# Altium PCB PCB2.PcbDoc
Units mm, origin at the board's own origin, x right, y up, seen from the top; angles counter-clockwise.
Board outline 51 x 64 mm, 2 copper layers (Top Layer, Bottom Layer); 5 components, 40 nets, 100 pads, 20 vias.
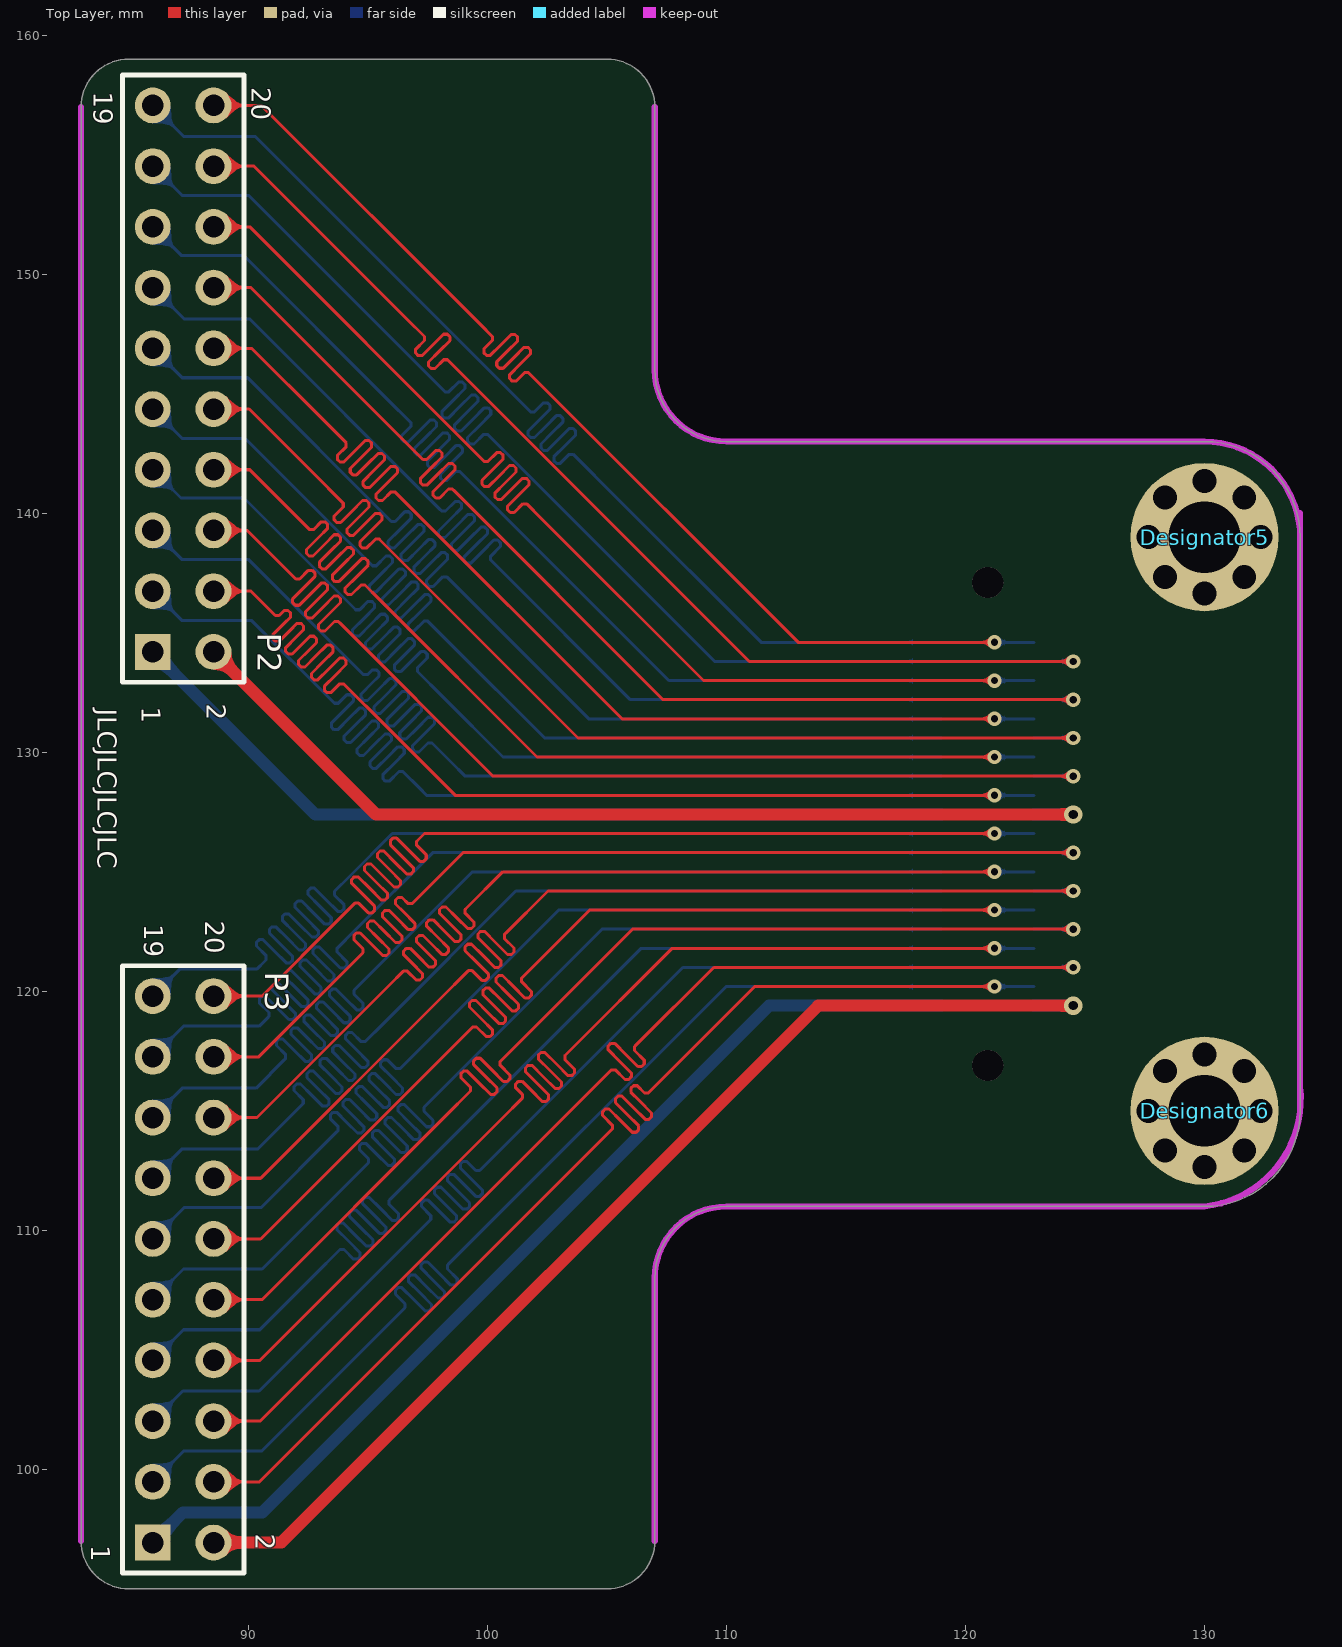
[diagram p0: Top Layer view]
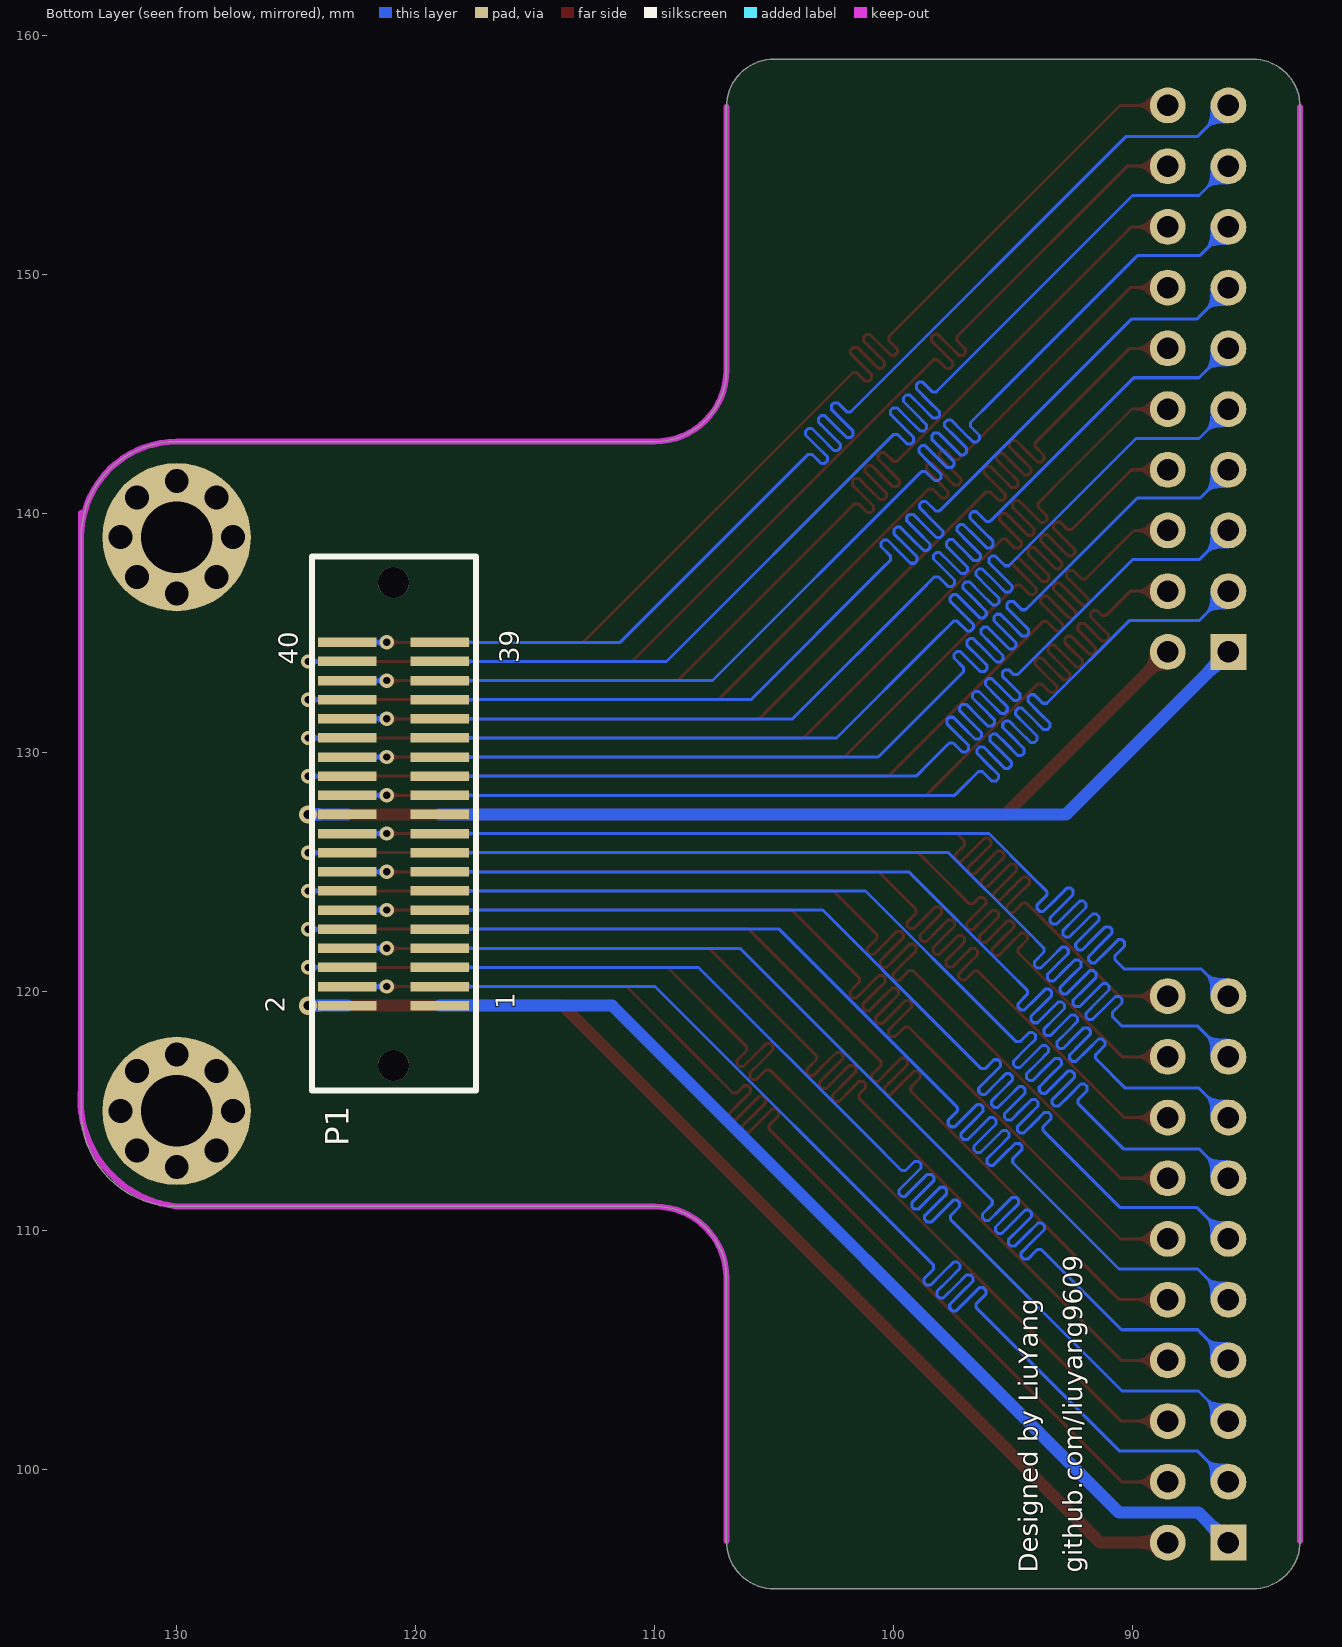
[diagram p1: Bottom Layer view, seen from below]

## Layer stack, top to bottom
Top Solder: solder mask 0.0102, Solder Resist, Dk 3.5
Top Layer: signal copper 0.0356
Dielectric 1: dielectric 0.32, FR-4, Dk 4.8
Bottom Layer: signal copper 0.0356
Bottom Solder: solder mask 0.0102, Solder Resist, Dk 3.5

## Board outline
85,95 105,95 ccw(c105,97) 107,97 107,108 cw(c110,108) 110,111 130,111 ccw(c130,115) 134,115 134,139 ccw(c130,139) 130,143 110,143 cw(c110,146) 107,146 107,157 ccw(c105,157) 105,159 85,159 ccw(c85,157) 83,157 83,97 ccw(c85,97)

## Design rules (kind name [scope] priority, off if disabled: settings)
Clearance [All] p1: gap=0.2
Length 2 [InNetClass('Right')] p1: maxlimit=51 minlimit=50
Length 1 [InNetClass('Left')] p2: maxlimit=51 minlimit=50
PolygonConnect [All] p1: connectstyle=Relief reliefconductorwidth=0.254 reliefentries=4 polygonreliefangle="90 Angle" airgapwidth=0.254
RoutingVias [All] p1: holewidth=0.3 width=0.6 viastyle="Through Hole" minholewidth=0.3 minwidth=0.6 maxholewidth=5 maxwidth=5
SolderMaskExpansion [All] p1: expansion=0.102
Width [All] p1: maxlimit=1.27 minlimit=0.127 preferedwidth=0.127
30 further rules are at their usual default settings.

## Classes and differential pairs
net class Right: RIGHT_P3 RIGHT_P4 RIGHT_P5 RIGHT_P6 RIGHT_P7 RIGHT_P8 RIGHT_P9 RIGHT_P10 RIGHT_P11 RIGHT_P12 RIGHT_P13 RIGHT_P14 RIGHT_P15 RIGHT_P16 RIGHT_P17 RIGHT_P18 RIGHT_P19 RIGHT_P20
net class Left: LEFT_P3 LEFT_P4 LEFT_P5 LEFT_P6 LEFT_P7 LEFT_P8 LEFT_P9 LEFT_P10 LEFT_P11 LEFT_P12 LEFT_P13 LEFT_P14 LEFT_P15 LEFT_P16 LEFT_P17 LEFT_P18 LEFT_P19 LEFT_P20
component class Sheet1: P2 P3

## Components (designator, comment, footprint, x,y, rotation, side; value= is the part's Value field where it differs from the comment)
Designator5 "Comment" 定位孔 130,139 r0 top
Designator6 "Comment" 定位孔 130,115 r0 top
P1 "Header 20X2" BTB0.8con40Pin 119,119.4 r0 bottom
P2 "Header 10X2" HDR2X10 86,134.2 r90 top
P3 "Header 10X2" HDR2X10 86,96.94 r90 top

## Footprints (in the part's own frame and the unit in brackets; to place one, negate y for a bottom-side part, rotate by r counter-clockwise, add the part's x,y. Pads: shape width x height; smd on the part's side, far side on the other; paste and mask are expansions set on the pad)
BTB0.8con40Pin [mm]
  rect 2.44x0.4 smd: 1(0,0) 2(3.86,0) 3(0,-0.8) 4(3.86,-0.8) 5(0,-1.6) 6(3.86,-1.6) 7(0,-2.4) 8(3.86,-2.4) 9(0,-3.2) 10(3.86,-3.2) 11(0,-4) 12(3.86,-4) 13(0,-4.8) 14(3.86,-4.8) 15(0,-5.6) 16(3.86,-5.6) 17(0,-6.4) 18(3.86,-6.4) 19(0,-7.2) 20(3.86,-7.2) 21(0,-8) 22(3.86,-8) 23(0,-8.8) 24(3.86,-8.8) 25(0,-9.6) 26(3.86,-9.6) 27(0,-10.4) 28(3.86,-10.4) 29(0,-11.2) 30(3.86,-11.2) 31(0,-12) 32(3.86,-12) 33(0,-12.8) 34(3.86,-12.8) 35(0,-13.6) 36(3.86,-13.6) 37(0,-14.4) 38(3.86,-14.4) 39(0,-15.2) 40(3.86,-15.2)
  round 1.3 hole 1.3: 41(1.93,-17.7) 42(1.93,2.5)
  silkscreen extent -1.52,-18.8 5.33,3.56
HDR2X10 [mm] "Connector; Header; 10x2 Position"
  rect 1.5x1.5 hole 0.9: 1(0,0)
  round 1.5 hole 0.9: 2(0,-2.54) 3(2.54,0) 4(2.54,-2.54) 5(5.08,0) 6(5.08,-2.54) 7(7.62,0) 8(7.62,-2.54) 9(10.16,0) 10(10.16,-2.54) 11(12.7,0) 12(12.7,-2.54) 13(15.24,0) 14(15.24,-2.54) 15(17.78,0) 16(17.78,-2.54) 17(20.32,0) 18(20.32,-2.54) 19(22.86,0) 20(22.86,-2.54)
  silkscreen extent -1.27,-3.81 24.13,1.27
定位孔 [mm]
  round 1 hole 1: 1(-2.35,0) 1(-1.662,-1.662) 1(-1.662,1.662) 1(0,-2.35) 1(0,2.35) 1(1.662,-1.662) 1(1.662,1.662) 1(2.35,0)
  round 6.2 hole 3: 1(0,0)

## Part data
P1: "Header, 20-Pin, Dual row"
P2 P3: "Header, 10-Pin, Dual row"

## Via types
v1: diameter 0.6, hole 0.3, Top Layer to Bottom Layer, 18 vias
v2: diameter 0.762, hole 0.381, Top Layer to Bottom Layer, 2 vias

## Nets (pads, with @x,y where several pads share a name; then routed paths per layer and width w, separated by ;. In a path a pad name is that pad's centre, name@x,y a point inside that pad or via, vN(x,y) a via of type N, cw(c..) or ccw(c..) an arc to the next point about the centre after c; other vN are vias at no path point)
LEFT_P1: P1.1 P3.1 | length 42.3
  Bottom Layer w0.508: P3.1 87.256,98.196 90.576,98.196 111.78,119.4 P1.1
LEFT_P2: P1.2 P3.2 | length 46.9
  Top Layer w0.508: P3.2 91.377,96.94 113.837,119.4 v2(124.507,119.4)
  Bottom Layer w0.508: P1.2 v2(124.507,119.4)
LEFT_P3: P1.3 P3.3 | length 50.2
  Bottom Layer w0.127: P3.3 87.282,100.762 90.551,100.762 95.529,105.74 96.555,106.766 96.555,106.927 96.151,107.331 96.151,107.493 96.259,107.601 96.42,107.601 96.905,107.116 97.39,106.631 97.552,106.631 97.659,106.739 97.659,106.901 97.175,107.385 96.69,107.87 96.69,108.032 96.797,108.14 96.959,108.14 97.444,107.655 97.929,107.17 98.09,107.17 98.198,107.278 98.198,107.439 97.713,107.924 97.229,108.409 97.229,108.571 97.336,108.678 97.498,108.678 97.983,108.194 98.468,107.709 98.629,107.709 98.737,107.816 98.737,107.978 98.333,108.382 98.333,108.544 98.387,108.598 109.989,120.2 P1.3
LEFT_P4: P1.4 P3.4 | length 49.8
  Top Layer w0.127: P3.4 90.463,99.48 105.169,114.186 105.223,114.24 105.223,114.401 104.819,114.805 104.819,114.967 104.926,115.075 105.088,115.075 105.573,114.59 106.058,114.105 106.219,114.105 106.327,114.213 106.327,114.374 105.842,114.859 105.357,115.344 105.357,115.506 105.465,115.613 105.627,115.613 106.112,115.129 106.596,114.644 106.758,114.644 106.866,114.752 106.866,114.913 106.381,115.398 105.999,115.78 105.999,115.942 106.106,116.05 106.268,116.05 106.57,115.748 106.731,115.748 108.077,117.094 111.183,120.2 v1(121.213,120.2)
  Bottom Layer w0.127: v1(121.213,120.2) P1.4
LEFT_P5: P1.5 P3.5 | length 50.5
  Bottom Layer w0.127: P3.5 87.256,103.276 90.449,103.276 97.574,110.401 97.628,110.455 97.628,110.617 97.249,110.996 97.249,111.158 97.356,111.265 97.518,111.265 97.978,110.805 98.438,110.345 98.6,110.345 98.708,110.453 98.708,110.615 98.248,111.075 97.788,111.535 97.788,111.696 97.895,111.804 98.057,111.804 98.517,111.344 98.977,110.884 99.139,110.884 99.247,110.992 99.247,111.153 98.786,111.613 98.326,112.074 98.326,112.235 98.434,112.343 98.596,112.343 99.056,111.883 99.516,111.423 99.678,111.423 99.785,111.531 99.785,111.692 99.325,112.152 98.865,112.612 98.865,112.774 98.973,112.882 99.135,112.882 99.514,112.502 99.675,112.502 101.054,113.881 108.173,121 P1.5
LEFT_P6: P1.6 P3.6 | length 49.7
  Top Layer w0.127: P3.6 90.488,102.02 103.378,114.91 105.186,116.718 105.348,116.718 105.752,116.314 105.914,116.314 106.021,116.422 106.021,116.583 105.537,117.068 105.052,117.553 105.052,117.715 105.159,117.822 105.321,117.822 105.806,117.338 106.291,116.853 106.452,116.853 106.56,116.96 106.56,117.122 106.156,117.526 106.156,117.688 106.21,117.742 109.468,121 v1(124.507,121)
  Bottom Layer w0.127: P1.6 v1(124.507,121)
LEFT_P7: P1.7 P3.7 | length 50.3
  Bottom Layer w0.127: P3.7 87.282,105.842 90.475,105.842 92.71,108.077 93.834,109.201 93.996,109.201 94.4,108.797 94.562,108.797 94.67,108.905 94.67,109.067 94.185,109.552 93.7,110.037 93.7,110.198 93.808,110.306 93.969,110.306 94.454,109.821 94.939,109.336 95.101,109.336 95.208,109.444 95.208,109.606 94.723,110.09 94.239,110.575 94.239,110.737 94.346,110.845 94.508,110.845 94.993,110.36 95.478,109.875 95.639,109.875 95.747,109.983 95.747,110.144 95.262,110.629 94.777,111.114 94.777,111.276 94.885,111.384 95.047,111.384 95.532,110.899 96.017,110.414 96.178,110.414 96.286,110.522 96.286,110.683 95.882,111.087 95.882,111.249 95.936,111.303 106.433,121.8 P1.7
LEFT_P8: P1.8 P3.8 | length 49.8
  Top Layer w0.127: P3.8 90.488,104.56 100.584,114.656 101.457,115.529 101.457,115.69 101.183,115.964 101.183,116.126 101.291,116.234 101.452,116.234 101.807,115.879 102.292,115.394 102.454,115.394 102.562,115.502 102.562,115.664 102.077,116.148 101.592,116.633 101.592,116.795 101.7,116.903 101.861,116.903 102.346,116.418 102.831,115.933 102.993,115.933 103.1,116.041 103.1,116.202 102.616,116.687 102.131,117.172 102.131,117.334 102.238,117.441 102.4,117.441 102.885,116.957 103.37,116.472 103.531,116.472 103.639,116.579 103.639,116.741 103.235,117.145 103.235,117.307 103.289,117.361 107.728,121.8 v1(121.213,121.8)
  Bottom Layer w0.127: v1(121.213,121.8) P1.8
LEFT_P9: P1.9 P3.9 | length 50.5
  Bottom Layer w0.127: P3.9 87.282,108.382 90.576,108.382 94.971,112.776 95.024,112.83 95.024,112.992 94.643,113.373 94.643,113.534 94.751,113.642 94.913,113.642 95.375,113.18 95.837,112.718 95.998,112.718 96.106,112.826 96.106,112.987 95.644,113.45 95.182,113.912 95.182,114.073 95.29,114.181 95.451,114.181 95.914,113.719 96.376,113.257 96.537,113.257 96.645,113.365 96.645,113.526 96.183,113.988 95.721,114.45 95.721,114.612 95.829,114.72 95.99,114.72 96.452,114.258 96.914,113.796 97.076,113.796 97.184,113.903 97.184,114.065 96.722,114.527 96.26,114.989 96.26,115.151 96.367,115.259 96.529,115.259 96.991,114.797 97.453,114.334 97.615,114.334 97.723,114.442 97.723,114.604 97.341,114.985 97.341,115.147 99.289,117.094 104.795,122.6 P1.9
LEFT_P10: P1.10 P3.10 | length 49.8
  Top Layer w0.127: P3.10 90.565,107.1 98.26,114.795 99.291,115.826 99.291,115.988 98.887,116.392 98.887,116.554 98.995,116.661 99.156,116.661 99.641,116.176 100.126,115.692 100.288,115.692 100.395,115.799 100.395,115.961 99.91,116.446 99.426,116.931 99.426,117.092 99.533,117.2 99.695,117.2 100.18,116.715 100.665,116.23 100.826,116.23 100.934,116.338 100.934,116.5 100.53,116.904 100.53,117.066 100.584,117.119 106.065,122.6 v1(124.507,122.6)
  Bottom Layer w0.127: P1.10 v1(124.507,122.6)
LEFT_P11: P1.11 P3.11 | length 50.5
  Bottom Layer w0.127: P3.11 87.307,110.947 90.526,110.947 93.701,114.122 93.754,114.176 93.754,114.338 93.425,114.667 93.425,114.828 93.533,114.936 93.695,114.936 94.105,114.526 94.56,114.071 94.722,114.071 94.83,114.178 94.83,114.34 94.374,114.796 93.964,115.206 93.964,115.367 94.072,115.475 94.234,115.475 94.644,115.065 95.099,114.609 95.261,114.609 95.369,114.717 95.369,114.879 94.913,115.335 94.503,115.744 94.503,115.906 94.611,116.014 94.773,116.014 95.182,115.604 95.638,115.148 95.8,115.148 95.908,115.256 95.908,115.418 95.452,115.873 95.042,116.283 95.042,116.445 95.15,116.553 95.311,116.553 95.721,116.143 96.177,115.687 96.339,115.687 96.446,115.795 96.446,115.956 95.991,116.412 95.535,116.868 95.535,117.03 95.643,117.137 95.804,117.137 96.179,116.762 96.341,116.762 97.955,118.377 102.978,123.4 P1.11
LEFT_P12: P1.12 P3.12 | length 50
  Top Layer w0.127: P3.12 90.514,109.64 98.412,117.538 99.384,118.511 99.546,118.511 99.95,118.106 100.112,118.106 100.219,118.214 100.219,118.376 99.735,118.861 99.25,119.346 99.25,119.507 99.357,119.615 99.519,119.615 100.004,119.13 100.489,118.645 100.65,118.645 100.758,118.753 100.758,118.915 100.273,119.4 99.808,119.865 99.808,120.027 99.916,120.134 100.077,120.134 100.543,119.669 101.028,119.184 101.189,119.184 101.297,119.292 101.297,119.454 100.812,119.938 100.361,120.39 100.361,120.551 100.469,120.659 100.63,120.659 101.082,120.208 101.566,119.723 101.728,119.723 101.836,119.831 101.836,119.992 101.432,120.396 101.432,120.558 101.486,120.612 104.274,123.4 v1(121.213,123.4)
  Bottom Layer w0.127: v1(121.213,123.4) P1.12
LEFT_P13: P1.13 P3.13 | length 50.5
  Bottom Layer w0.127: P3.13 87.231,113.411 90.399,113.411 92.24,115.252 92.294,115.306 92.294,115.468 91.911,115.851 91.911,116.013 92.019,116.12 92.181,116.12 92.644,115.657 93.108,115.193 93.27,115.193 93.377,115.301 93.377,115.462 92.914,115.926 92.45,116.39 92.45,116.551 92.558,116.659 92.719,116.659 93.183,116.195 93.647,115.732 93.808,115.732 93.916,115.84 93.916,116.001 93.452,116.465 92.989,116.928 92.989,117.09 93.097,117.198 93.258,117.198 93.722,116.734 94.186,116.271 94.347,116.271 94.455,116.378 94.455,116.54 93.991,117.004 93.528,117.467 93.528,117.629 93.635,117.737 93.797,117.737 94.261,117.273 94.724,116.809 94.886,116.809 94.994,116.917 94.994,117.079 94.53,117.542 94.066,118.006 94.066,118.168 94.174,118.276 94.336,118.276 94.719,117.893 94.88,117.893 95.656,118.669 101.188,124.2 P1.13
LEFT_P14: P1.14 P3.14 | length 49.8
  Top Layer w0.127: P3.14 90.514,112.18 97.993,119.659 99.199,120.865 99.361,120.865 99.765,120.461 99.927,120.461 100.034,120.569 100.034,120.731 99.549,121.216 99.065,121.701 99.065,121.862 99.172,121.97 99.334,121.97 99.819,121.485 100.304,121 100.465,121 100.573,121.108 100.573,121.27 100.088,121.754 99.603,122.239 99.603,122.401 99.711,122.509 99.873,122.509 100.358,122.024 100.843,121.539 101.004,121.539 101.112,121.647 101.112,121.808 100.708,122.212 100.708,122.374 100.762,122.428 102.534,124.2 v1(124.507,124.2)
  Bottom Layer w0.127: P1.14 v1(124.507,124.2)
LEFT_P15: P1.15 P3.15 | length 50.5
  Bottom Layer w0.127: P3.15 87.231,115.951 90.322,115.951 91.504,117.132 91.557,117.186 91.557,117.348 91.172,117.733 91.172,117.895 91.279,118.003 91.441,118.003 91.908,117.536 92.374,117.07 92.536,117.07 92.644,117.177 92.644,117.339 92.177,117.806 91.778,118.204 91.778,118.366 91.886,118.474 92.048,118.474 92.446,118.075 92.913,117.608 93.075,117.608 93.182,117.716 93.182,117.878 92.716,118.344 92.317,118.743 92.317,118.905 92.425,119.012 92.587,119.012 92.985,118.614 93.452,118.147 93.614,118.147 93.721,118.255 93.721,118.417 93.255,118.883 92.856,119.282 92.856,119.443 92.964,119.551 93.125,119.551 93.524,119.153 93.991,118.686 94.152,118.686 94.26,118.794 94.26,118.955 93.793,119.422 93.395,119.821 93.395,119.982 93.503,120.09 93.664,120.09 94.063,119.691 94.53,119.225 94.691,119.225 94.799,119.333 94.799,119.494 94.413,119.88 94.413,120.042 95.263,120.891 99.371,125 P1.15
LEFT_P16: P1.16 P3.16 | length 50.1
  Top Layer w0.127: P3.16 90.361,114.72 95.885,120.244 96.483,120.842 96.645,120.842 97.016,120.471 97.177,120.471 97.285,120.579 97.285,120.741 96.834,121.192 96.496,121.529 96.496,121.691 96.604,121.799 96.766,121.799 97.103,121.462 97.555,121.01 97.716,121.01 97.824,121.118 97.824,121.279 97.372,121.731 97.035,122.068 97.035,122.23 97.143,122.337 97.305,122.337 97.642,122 98.093,121.549 98.255,121.549 98.363,121.657 98.363,121.818 97.911,122.27 97.46,122.721 97.46,122.883 97.567,122.991 97.729,122.991 98.181,122.539 98.632,122.088 98.794,122.088 98.902,122.195 98.902,122.357 98.45,122.809 97.998,123.26 97.998,123.422 98.106,123.53 98.268,123.53 98.719,123.078 99.171,122.626 99.333,122.626 99.44,122.734 99.44,122.896 99.07,123.267 99.07,123.428 99.123,123.482 100.641,125 v1(121.213,125)
  Bottom Layer w0.127: v1(121.213,125) P1.16
LEFT_P17: P1.17 P3.17 | length 50.5
  Bottom Layer w0.127: P3.17 87.282,118.542 90.449,118.542 90.805,118.897 90.859,118.951 90.859,119.113 90.457,119.515 90.457,119.677 90.564,119.785 90.726,119.785 91.209,119.302 91.692,118.818 91.854,118.818 91.962,118.926 91.962,119.088 91.479,119.571 90.995,120.054 90.995,120.216 91.103,120.323 91.265,120.323 91.748,119.84 92.231,119.357 92.393,119.357 92.5,119.465 92.5,119.627 92.017,120.11 91.534,120.593 91.534,120.754 91.642,120.862 91.804,120.862 92.287,120.379 92.77,119.896 92.931,119.896 93.039,120.004 93.039,120.166 92.556,120.649 92.164,121.041 92.164,121.203 92.272,121.31 92.433,121.31 92.826,120.918 93.309,120.435 93.47,120.435 93.578,120.543 93.578,120.704 93.095,121.187 92.703,121.58 92.703,121.741 92.81,121.849 92.972,121.849 93.364,121.457 93.847,120.974 94.009,120.974 94.117,121.081 94.117,121.243 93.715,121.645 93.715,121.807 94.45,122.542 97.708,125.8 P1.17
LEFT_P18: P1.18 P3.18 | length 50.1
  Top Layer w0.127: P3.18 90.438,117.26 94.742,121.564 94.796,121.618 94.796,121.78 94.408,122.168 94.408,122.33 94.516,122.437 94.677,122.437 95.146,121.969 95.615,121.5 95.777,121.5 95.884,121.608 95.884,121.769 95.416,122.238 94.981,122.672 94.981,122.834 95.089,122.942 95.251,122.942 95.685,122.507 96.154,122.039 96.315,122.039 96.423,122.146 96.423,122.308 95.954,122.777 95.613,123.118 95.613,123.28 95.721,123.388 95.882,123.388 96.224,123.046 96.693,122.577 96.854,122.577 96.962,122.685 96.962,122.847 96.493,123.316 96.152,123.657 96.152,123.819 96.259,123.926 96.421,123.926 96.682,123.666 96.843,123.666 98.171,124.993 98.978,125.8 v1(124.507,125.8)
  Bottom Layer w0.127: P1.18 v1(124.507,125.8)
LEFT_P19: P1.19 P3.19 | length 50.3
  Bottom Layer w0.127: P3.19 87.129,120.929 90.348,120.929 90.691,121.272 90.745,121.326 90.745,121.488 90.341,121.892 90.341,122.054 90.448,122.161 90.61,122.161 91.095,121.676 91.58,121.192 91.741,121.192 91.849,121.299 91.849,121.461 91.364,121.946 90.879,122.431 90.879,122.592 90.987,122.7 91.149,122.7 91.634,122.215 92.118,121.73 92.28,121.73 92.388,121.838 92.388,122 91.903,122.485 91.418,122.969 91.418,123.131 91.526,123.239 91.688,123.239 92.172,122.754 92.657,122.269 92.819,122.269 92.927,122.377 92.927,122.539 92.442,123.023 91.957,123.508 91.957,123.67 92.065,123.778 92.226,123.778 92.711,123.293 93.196,122.808 93.358,122.808 93.466,122.916 93.466,123.077 92.981,123.562 92.496,124.047 92.496,124.209 92.604,124.317 92.765,124.317 93.25,123.832 93.735,123.347 93.897,123.347 94.004,123.455 94.004,123.616 93.6,124.02 93.6,124.182 94.247,124.828 96.018,126.6 P1.19
LEFT_P20: P1.20 P3.20 | length 50.1
  Top Layer w0.127: P3.20 90.565,119.8 93.878,123.114 94.451,123.687 94.613,123.687 95.015,123.285 95.177,123.285 95.284,123.393 95.284,123.554 94.802,124.037 94.319,124.52 94.319,124.681 94.427,124.789 94.588,124.789 95.071,124.306 95.554,123.824 95.715,123.824 95.823,123.931 95.823,124.093 95.34,124.576 94.858,125.059 94.858,125.22 94.965,125.328 95.127,125.328 95.61,124.845 96.093,124.362 96.254,124.362 96.362,124.47 96.362,124.632 95.879,125.115 95.396,125.597 95.396,125.759 95.504,125.867 95.666,125.867 96.149,125.384 96.631,124.901 96.793,124.901 96.901,125.009 96.901,125.171 96.418,125.653 95.935,126.136 95.935,126.298 96.043,126.406 96.205,126.406 96.687,125.923 97.17,125.44 97.332,125.44 97.44,125.548 97.44,125.709 97.038,126.111 97.038,126.273 97.091,126.327 97.365,126.6 v1(121.213,126.6)
  Bottom Layer w0.127: v1(121.213,126.6) P1.20
RIGHT_P1: P1.21 P2.1 | length 35.8
  Bottom Layer w0.508: P2.1 92.8,127.4 P1.21
RIGHT_P2: P1.22 P2.2 | length 40.4
  Top Layer w0.508: P2.2 95.34,127.4 v2(124.507,127.4)
  Bottom Layer w0.508: P1.22 v2(124.507,127.4)
RIGHT_P3: P1.23 P2.3 | length 50.1
  Bottom Layer w0.127: P2.3 87.231,135.509 90.145,135.509 93.548,132.105 93.602,132.052 93.764,132.052 94.119,132.407 94.28,132.407 94.388,132.299 94.388,132.137 93.952,131.701 93.467,131.216 93.467,131.055 93.575,130.947 93.737,130.947 94.222,131.432 94.633,131.844 94.795,131.844 94.903,131.736 94.903,131.574 94.491,131.162 94.006,130.678 94.006,130.516 94.114,130.408 94.276,130.408 94.761,130.893 95.172,131.305 95.334,131.305 95.442,131.197 95.442,131.035 95.03,130.624 94.545,130.139 94.545,129.977 94.653,129.869 94.814,129.869 95.299,130.354 95.711,130.766 95.873,130.766 95.98,130.658 95.98,130.497 95.569,130.085 95.084,129.6 95.084,129.438 95.192,129.331 95.353,129.331 95.838,129.815 96.25,130.227 96.412,130.227 96.519,130.119 96.519,129.958 96.108,129.546 95.623,129.061 95.623,128.9 95.73,128.792 95.892,128.792 96.296,129.196 96.458,129.196 97.142,128.511 97.454,128.2 P1.23
RIGHT_P4: P1.24 P2.4 | length 50.1
  Top Layer w0.127: P2.4 90.107,136.74 91.072,135.776 91.126,135.722 91.287,135.722 91.497,135.932 91.659,135.932 91.766,135.824 91.766,135.662 91.476,135.372 91.021,134.917 91.021,134.755 91.129,134.647 91.29,134.647 91.745,135.102 92.036,135.393 92.197,135.393 92.305,135.285 92.305,135.123 92.015,134.833 91.56,134.378 91.56,134.216 91.667,134.108 91.829,134.108 92.284,134.563 92.575,134.854 92.736,134.854 92.844,134.746 92.844,134.585 92.553,134.294 92.098,133.839 92.098,133.677 92.206,133.57 92.368,133.57 92.823,134.025 93.278,134.48 93.439,134.48 93.547,134.372 93.547,134.21 93.092,133.755 92.637,133.3 92.637,133.139 92.745,133.031 92.907,133.031 93.362,133.486 93.817,133.941 93.978,133.941 94.086,133.833 94.086,133.671 93.631,133.216 93.176,132.761 93.176,132.6 93.284,132.492 93.446,132.492 93.82,132.866 93.981,132.866 95.783,131.064 98.647,128.2 v1(121.213,128.2)
  Bottom Layer w0.127: v1(121.213,128.2) P1.24
RIGHT_P5: P1.25 P2.5 | length 50.5
  Bottom Layer w0.127: P2.5 87.206,138.074 89.992,138.074 94.767,133.299 94.821,133.245 94.983,133.245 95.19,133.452 95.351,133.452 95.459,133.344 95.459,133.183 95.172,132.895 94.715,132.439 94.715,132.277 94.823,132.169 94.985,132.169 95.441,132.626 95.897,133.082 96.059,133.082 96.167,132.974 96.167,132.813 95.71,132.356 95.254,131.9 95.254,131.738 95.362,131.631 95.523,131.631 95.98,132.087 96.436,132.543 96.598,132.543 96.705,132.435 96.705,132.274 96.249,131.817 95.793,131.361 95.793,131.2 95.901,131.092 96.062,131.092 96.519,131.548 96.975,132.004 97.137,132.004 97.244,131.897 97.244,131.735 96.788,131.279 96.332,130.822 96.332,130.661 96.439,130.553 96.601,130.553 97.057,131.009 97.514,131.466 97.675,131.466 97.783,131.358 97.783,131.196 97.327,130.74 96.87,130.284 96.87,130.122 96.978,130.014 97.14,130.014 97.515,130.39 97.677,130.39 98.45,129.616 99.067,129 P1.25
RIGHT_P6: P1.26 P2.6 | length 50.1
  Top Layer w0.127: P2.6 89.955,139.28 90.564,138.671 91.983,137.252 92.145,137.252 92.507,137.615 92.669,137.615 92.776,137.507 92.776,137.345 92.333,136.902 91.853,136.421 91.853,136.26 91.96,136.152 92.122,136.152 92.603,136.632 93.046,137.076 93.207,137.076 93.315,136.968 93.315,136.806 92.872,136.363 92.392,135.883 92.392,135.721 92.499,135.613 92.661,135.613 93.141,136.094 93.585,136.537 93.746,136.537 93.854,136.429 93.854,136.267 93.411,135.824 92.93,135.344 92.93,135.182 93.038,135.074 93.2,135.074 93.599,135.474 93.761,135.474 93.815,135.42 100.235,129 v1(124.507,129)
  Bottom Layer w0.127: P1.26 v1(124.507,129)
RIGHT_P7: P1.27 P2.7 | length 50.2
  Bottom Layer w0.127: P2.7 87.18,140.64 89.814,140.64 94.437,136.017 94.491,135.963 94.653,135.963 95.004,136.314 95.165,136.314 95.273,136.206 95.273,136.044 94.841,135.613 94.356,135.128 94.356,134.966 94.464,134.859 94.626,134.859 95.111,135.343 95.542,135.775 95.704,135.775 95.812,135.667 95.812,135.506 95.38,135.074 94.895,134.589 94.895,134.428 95.003,134.32 95.165,134.32 95.65,134.805 96.081,135.236 96.243,135.236 96.351,135.129 96.351,134.967 95.919,134.535 95.434,134.05 95.434,133.889 95.542,133.781 95.703,133.781 96.188,134.266 96.673,134.751 96.835,134.751 96.943,134.643 96.943,134.481 96.458,133.996 96.103,133.641 96.103,133.48 96.21,133.372 96.372,133.372 96.727,133.727 97.212,134.212 97.374,134.212 97.481,134.104 97.481,133.942 97.077,133.538 97.077,133.377 98.133,132.321 100.654,129.8 P1.27
RIGHT_P8: P1.28 P2.8 | length 50.1
  Top Layer w0.127: P2.8 90.057,141.82 92.507,139.37 92.561,139.316 92.722,139.316 93.046,139.639 93.207,139.639 93.315,139.532 93.315,139.37 92.911,138.966 92.431,138.485 92.431,138.324 92.538,138.216 92.7,138.216 93.18,138.696 93.585,139.1 93.746,139.1 93.854,138.993 93.854,138.831 93.45,138.427 92.969,137.947 92.969,137.785 93.077,137.677 93.239,137.677 93.719,138.157 94.123,138.562 94.285,138.562 94.393,138.454 94.393,138.292 93.989,137.888 93.508,137.408 93.508,137.246 93.616,137.138 93.778,137.138 94.258,137.619 94.738,138.099 94.9,138.099 95.008,137.991 95.008,137.83 94.527,137.349 94.047,136.869 94.047,136.707 94.155,136.6 94.316,136.6 94.716,136.999 94.878,136.999 95.453,136.423 102.077,129.8 v1(121.213,129.8)
  Bottom Layer w0.127: v1(121.213,129.8) P1.28
RIGHT_P9: P1.29 P2.9 | length 50.3
  Bottom Layer w0.127: P2.9 87.231,143.129 89.865,143.129 95.136,137.858 95.19,137.805 95.351,137.805 95.755,138.209 95.917,138.209 96.025,138.101 96.025,137.939 95.54,137.454 95.055,136.97 95.055,136.808 95.163,136.7 95.324,136.7 95.809,137.185 96.294,137.67 96.456,137.67 96.563,137.562 96.563,137.4 96.079,136.916 95.594,136.431 95.594,136.269 95.702,136.161 95.863,136.161 96.348,136.646 96.833,137.131 96.995,137.131 97.102,137.023 97.102,136.862 96.617,136.377 96.133,135.892 96.133,135.73 96.24,135.622 96.402,135.622 96.887,136.107 97.372,136.592 97.533,136.592 97.641,136.484 97.641,136.323 97.156,135.838 96.671,135.353 96.671,135.191 96.779,135.084 96.941,135.084 97.345,135.488 97.506,135.488 98.387,134.607 102.394,130.6 P1.29
RIGHT_P10: P1.30 P2.10 | length 50.1
  Top Layer w0.127: P2.10 90.031,144.36 92.71,141.681 93.967,140.424 93.967,140.263 93.588,139.884 93.588,139.723 93.696,139.615 93.858,139.615 94.317,140.074 94.775,140.532 94.936,140.532 95.044,140.424 95.044,140.262 94.586,139.805 94.127,139.345 94.127,139.184 94.235,139.076 94.397,139.076 94.856,139.535 95.315,139.995 95.477,139.995 95.585,139.887 95.585,139.725 95.125,139.266 94.666,138.807 94.666,138.645 94.774,138.537 94.935,138.537 95.314,138.916 95.476,138.916 95.529,138.862 103.791,130.6 v1(124.507,130.6)
  Bottom Layer w0.127: P1.30 v1(124.507,130.6)
RIGHT_P11: P1.31 P2.11 | length 50.5
  Bottom Layer w0.127: P2.11 87.231,145.669 89.967,145.669 95.923,139.713 95.977,139.659 96.139,139.659 96.543,140.063 96.704,140.063 96.812,139.955 96.812,139.793 96.327,139.309 95.842,138.824 95.842,138.662 95.95,138.554 96.112,138.554 96.597,139.039 97.081,139.524 97.243,139.524 97.351,139.416 97.351,139.255 96.866,138.77 96.381,138.285 96.381,138.123 96.489,138.016 96.651,138.016 97.135,138.5 97.528,138.893 97.689,138.893 97.797,138.785 97.797,138.623 97.405,138.231 96.92,137.746 96.92,137.584 97.028,137.477 97.189,137.477 97.674,137.962 98.067,138.354 98.228,138.354 98.336,138.246 98.336,138.084 97.944,137.692 97.459,137.207 97.459,137.046 97.567,136.938 97.728,136.938 98.132,137.342 98.294,137.342 98.92,136.715 104.236,131.4 P1.31
RIGHT_P12: P1.32 P2.12 | length 50.1
  Top Layer w0.127: P2.12 90.133,146.9 93.167,143.866 94.088,142.944 94.088,142.783 93.721,142.415 93.721,142.254 93.829,142.146 93.99,142.146 94.439,142.594 94.887,143.042 95.049,143.042 95.156,142.935 95.156,142.773 94.708,142.325 94.26,141.876 94.26,141.715 94.368,141.607 94.529,141.607 94.977,142.055 95.426,142.504 95.587,142.504 95.695,142.396 95.695,142.234 95.247,141.786 94.799,141.338 94.799,141.176 94.906,141.068 95.068,141.068 95.516,141.517 95.965,141.965 96.126,141.965 96.234,141.857 96.234,141.695 95.786,141.247 95.337,140.799 95.337,140.637 95.445,140.529 95.607,140.529 95.974,140.897 96.136,140.897 96.19,140.843 105.633,131.4 v1(121.213,131.4)
  Bottom Layer w0.127: v1(121.213,131.4) P1.32
RIGHT_P13: P1.33 P2.13 | length 50.3
  Bottom Layer w0.127: P2.13 87.307,148.133 90.043,148.133 98.031,140.144 98.085,140.091 98.247,140.091 98.651,140.495 98.813,140.495 98.92,140.387 98.92,140.225 98.435,139.74 97.951,139.256 97.951,139.094 98.058,138.986 98.22,138.986 98.705,139.471 99.19,139.956 99.351,139.956 99.459,139.848 99.459,139.686 98.974,139.202 98.489,138.717 98.489,138.555 98.597,138.447 98.759,138.447 99.244,138.932 99.728,139.417 99.89,139.417 99.998,139.309 99.998,139.148 99.513,138.663 99.028,138.178 99.028,138.016 99.136,137.908 99.298,137.908 99.782,138.393 100.267,138.878 100.429,138.878 100.537,138.77 100.537,138.609 100.133,138.205 100.133,138.043 100.482,137.693 105.976,132.2 P1.33
RIGHT_P14: P1.34 P2.14 | length 50.1
  Top Layer w0.127: P2.14 90.107,149.44 94.513,145.034 97.297,142.25 97.459,142.25 97.832,142.624 97.994,142.624 98.102,142.517 98.102,142.355 97.647,141.9 97.192,141.446 97.192,141.284 97.3,141.176 97.462,141.176 97.917,141.631 98.371,142.086 98.533,142.086 98.641,141.978 98.641,141.816 98.186,141.361 97.731,140.907 97.731,140.745 97.839,140.637 98.001,140.637 98.375,141.011 98.536,141.011 98.59,140.957 107.347,132.2 v1(124.507,132.2)
  Bottom Layer w0.127: P1.34 v1(124.507,132.2)
RIGHT_P15: P1.35 P2.15 | length 50.5
  Bottom Layer w0.127: P2.15 87.206,150.774 89.814,150.774 95.834,144.755 96.794,143.795 96.794,143.634 96.413,143.253 96.413,143.091 96.52,142.983 96.682,142.983 97.144,143.445 97.602,143.903 97.763,143.903 97.871,143.795 97.871,143.634 97.413,143.176 96.951,142.714 96.951,142.552 97.059,142.445 97.221,142.445 97.683,142.906 98.141,143.364 98.302,143.364 98.41,143.256 98.41,143.095 97.952,142.637 97.49,142.175 97.49,142.014 97.598,141.906 97.76,141.906 98.221,142.367 98.679,142.825 98.841,142.825 98.949,142.718 98.949,142.556 98.491,142.098 98.029,141.636 98.029,141.475 98.137,141.367 98.299,141.367 98.679,141.748 98.841,141.748 98.895,141.694 107.589,133 P1.35
RIGHT_P16: P1.36 P2.16 | length 50.1
  Top Layer w0.127: P2.16 90.057,151.98 99.809,142.227 99.863,142.173 100.025,142.173 100.388,142.536 100.549,142.536 100.657,142.428 100.657,142.267 100.213,141.823 99.77,141.38 99.77,141.218 99.878,141.11 100.039,141.11 100.483,141.554 100.926,141.997 101.088,141.997 101.196,141.89 101.196,141.728 100.752,141.284 100.309,140.841 100.309,140.679 100.416,140.571 100.578,140.571 101.022,141.015 101.465,141.459 101.627,141.459 101.735,141.351 101.735,141.189 101.291,140.746 100.847,140.302 100.847,140.14 100.955,140.033 101.117,140.033 101.48,140.395 101.641,140.395 102.235,139.802 109.037,133 v1(121.213,133)
  Bottom Layer w0.127: v1(121.213,133) P1.36
RIGHT_P17: P1.37 P2.17 | length 50.2
  Bottom Layer w0.127: P2.17 87.231,153.289 90.018,153.289 98.171,145.136 98.225,145.082 98.387,145.082 98.791,145.486 98.952,145.486 99.06,145.378 99.06,145.216 98.575,144.731 98.09,144.247 98.09,144.085 98.198,143.977 98.36,143.977 98.845,144.462 99.329,144.947 99.491,144.947 99.599,144.839 99.599,144.678 99.114,144.193 98.629,143.708 98.629,143.546 98.737,143.438 98.898,143.438 99.383,143.923 99.868,144.408 100.03,144.408 100.138,144.3 100.138,144.139 99.653,143.654 99.168,143.169 99.168,143.007 99.276,142.9 99.437,142.9 99.841,143.304 100.003,143.304 100.584,142.723 109.507,133.8 P1.37
RIGHT_P18: P1.38 P2.18 | length 50.1
  Top Layer w0.127: P2.18 90.234,154.52 96.647,148.107 97.363,147.391 97.363,147.23 96.996,146.863 96.996,146.701 97.104,146.593 97.266,146.593 97.713,147.041 98.161,147.489 98.323,147.489 98.43,147.381 98.43,147.219 97.983,146.772 97.535,146.324 97.535,146.162 97.643,146.055 97.805,146.055 98.171,146.421 98.333,146.421 98.387,146.368 110.954,133.8 v1(124.507,133.8)
  Bottom Layer w0.127: P1.38 v1(124.507,133.8)
RIGHT_P19: P1.39 P2.19 | length 50.5
  Bottom Layer w0.127: P2.19 87.307,155.753 90.297,155.753 101.752,144.297 101.806,144.244 101.968,144.244 102.345,144.62 102.506,144.62 102.614,144.512 102.614,144.351 102.157,143.893 101.699,143.436 101.699,143.274 101.807,143.166 101.969,143.166 102.426,143.624 102.883,144.081 103.045,144.081 103.153,143.974 103.153,143.812 102.695,143.354 102.238,142.897 102.238,142.735 102.346,142.628 102.507,142.628 102.965,143.085 103.422,143.542 103.584,143.542 103.692,143.435 103.692,143.273 103.234,142.816 102.777,142.358 102.777,142.197 102.884,142.089 103.046,142.089 103.423,142.465 103.584,142.465 105.397,140.653 111.45,134.6 P1.39
RIGHT_P20: P1.40 P2.20 | length 50.1
  Top Layer w0.127: P2.20 90.539,157.06 99.695,147.904 100.207,147.393 100.207,147.231 99.85,146.875 99.85,146.713 99.958,146.605 100.12,146.605 100.557,147.042 100.994,147.479 101.156,147.479 101.263,147.372 101.263,147.21 100.826,146.773 100.389,146.336 100.389,146.174 100.497,146.066 100.659,146.066 101.096,146.504 101.533,146.941 101.694,146.941 101.802,146.833 101.802,146.671 101.365,146.234 100.928,145.797 100.928,145.635 101.036,145.528 101.197,145.528 101.554,145.884 101.715,145.884 101.769,145.83 112.999,134.6 v1(121.213,134.6)
  Bottom Layer w0.127: v1(121.213,134.6) P1.40
pads on no net: Designator5.1 Designator6.1 P1.41 P1.42

## Keep-outs
Keep-Out Layer:
  lines w0.254: 83,97 83,157 ; 107,97 107,108 cw(c110,108) 110,111 130,111 ccw(c129.5,115.5) 134,116 ; 107,157 107,146 ccw(c110,146) 110,143 130,143 cw(c130,139) 134,139 ; 134,115 134,140

## Silkscreen, mask and mechanical layers (free items; w line width, h text height)
Top Overlay:
  text "JLCJLCJLCJLC" at 83.693,131.826 h0.8 r270
Bottom Overlay:
  text "39" at 115.697,133.731 h0.8 r270
  text "40" at 124.943,133.655 h0.8 r270
  text "1" at 115.849,119.253 h0.8 r270
  text "2" at 125.476,119.101 h0.8 r270
  text "github.com/liuyang9609" at 92.126,95.682 h0.8 r270
  text "Designed by LiuYang" at 93.98,95.682 h0.8 r270
Mechanical 1:
  lines w0.254: 83,97 ccw(c85,97) 85,95 105,95 ccw(c105,97) 107,97 107,108 cw(c110,108) 110,111 125,111 130,111 ccw(c130,115) 134,115 134,139 ccw(c130,139) 130,143 125,143 110,143 cw(c110,146) 107,146 107,157 ccw(c105,157) 105,159 85,159 ccw(c85,157) 83,157 83,97

## Text inside footprints (layer, text, board x,y; h text height)
P2: Top Overlay "2" at 88.265,132.029 h0.8 r270; Top Overlay "1" at 85.547,131.902 h0.8 r270; Top Overlay "19" at 83.525,157.625 h0.8 r270; Top Overlay "20" at 90.15,157.825 h0.8 r270
P3: Top Overlay "2" at 90.3,97.3 h0.8 r270; Top Overlay "1" at 83.425,96.825 h0.8 r270; Top Overlay "19" at 85.649,122.809 h0.8 r270; Top Overlay "20" at 88.189,122.961 h0.8 r270